# Altium PCB nrf24l01_cell(P40).PcbDoc (part 7 of 11)
Units mm, origin at the board's own origin, x right, y up, seen from the top; angles counter-clockwise.
Board outline 136.2 x 112.2 mm, 2 copper layers (TopLayer, BottomLayer); 520 components, 0 nets, 2804 pads, 1040 vias.
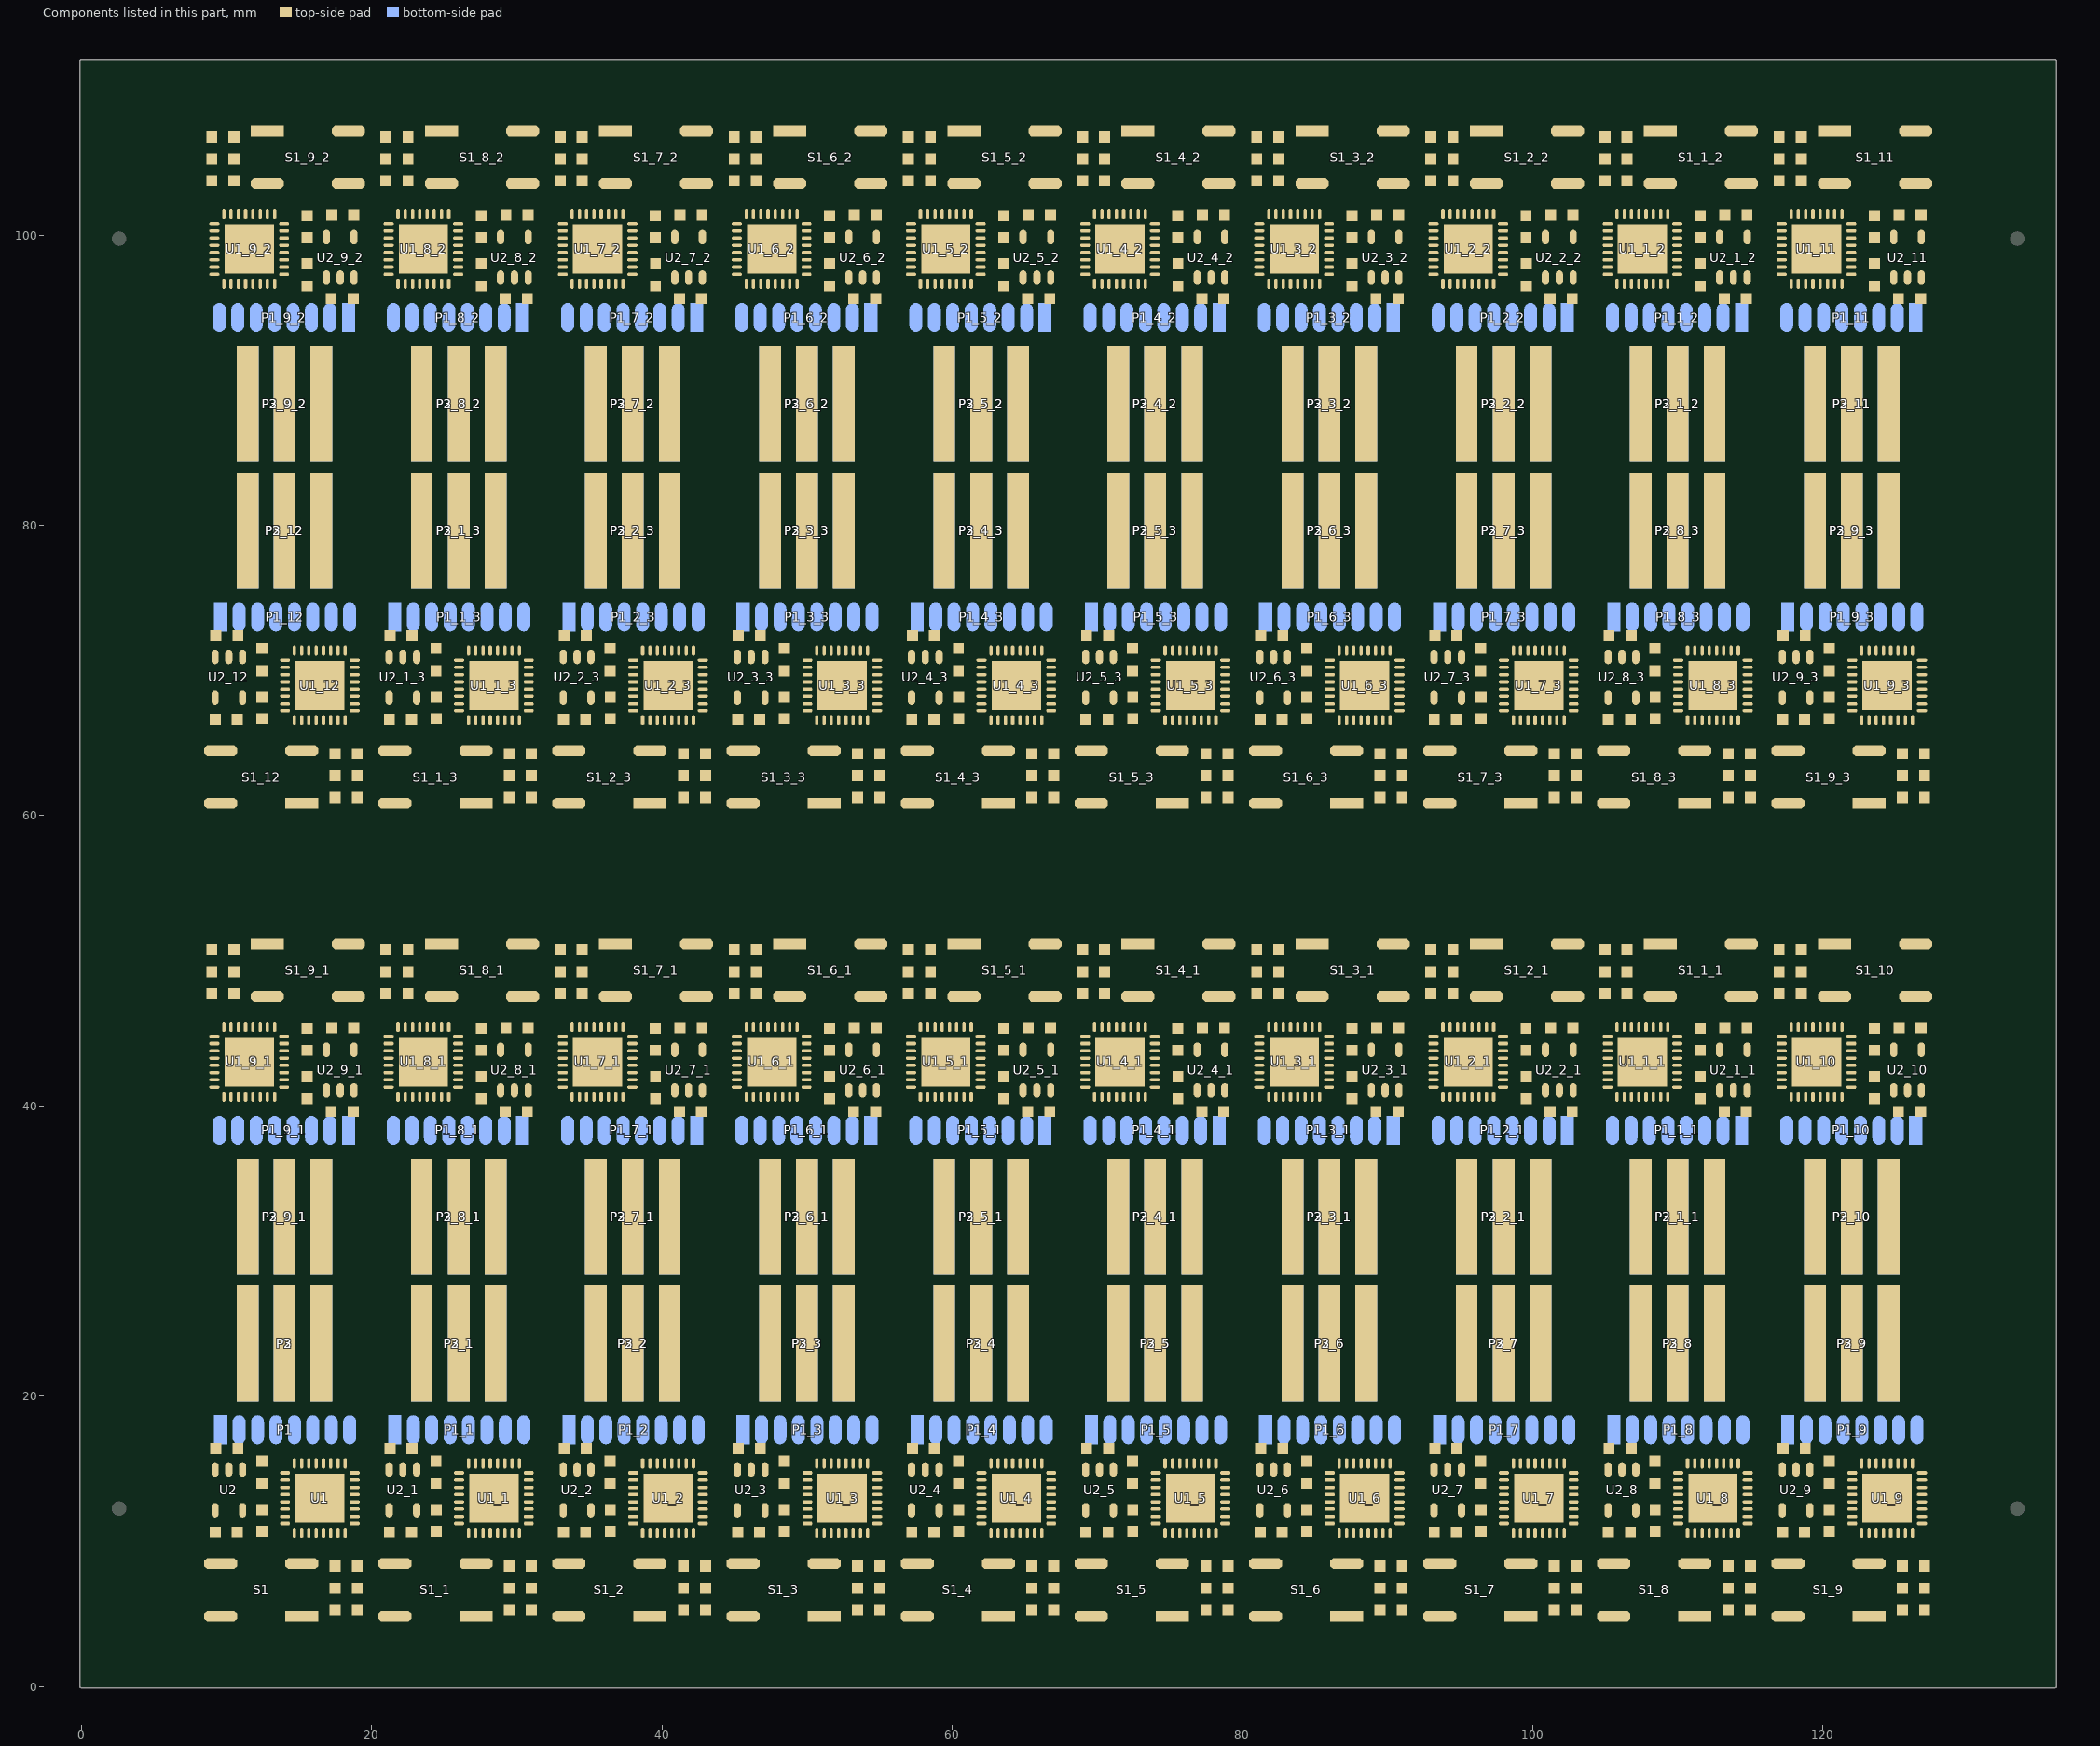
[diagram p7: the components of this part, seen from the top]

## Via types
v1: diameter 0.4, hole 0.2, TopLayer to BottomLayer, tented both sides, 1040 vias

## Nets (pads, with @x,y where several pads share a name; then routed paths per layer and width w, separated by ;. In a path a pad name is that pad's centre, name@x,y a point inside that pad or via, vN(x,y) a via of type N, cw(c..) or ccw(c..) an arc to the next point about the centre after c; other vN are vias at no path point) (continued)
copper on no net: (continued)
  TopLayer w0.254: 8.806,49.42 ccw(c8.373,49.853) 8.986,49.853 ccw(c9.599,49.853) 9.166,49.42 ; 8.806,50.58 cw(c8.373,50.147) 8.986,50.147 cw(c9.599,50.147) 9.166,50.58 ; 8.806,105.42 ccw(c8.373,105.853) 8.986,105.853 ccw(c9.599,105.853) 9.166,105.42 ; 8.806,106.58 cw(c8.373,106.147) 8.986,106.147 cw(c9.599,106.147) 9.166,106.58 ; 8.986,49.24 8.986,50.76 ; 8.986,105.24 8.986,106.76 ; 9.226,10.366 cw(c9.226,9.753) 9.66,10.186 cw(c10.093,10.62) 9.48,10.62 cw(c10.093,10.62) 9.66,11.054 cw(c9.226,11.487) 9.226,10.874 ; 9.226,66.366 cw(c9.226,65.753) 9.66,66.186 cw(c10.093,66.62) 9.48,66.62 cw(c10.093,66.62) 9.66,67.054 cw(c9.226,67.487) 9.226,66.874 ; 10.073,15.277 ccw(c9.863,15.487) 10.16,15.487 ccw(c10.457,15.487) 10.247,15.277 ; 10.073,71.277 ccw(c9.863,71.487) 10.16,71.487 ccw(c10.457,71.487) 10.247,71.277 ; 10.16,14.94 v1(10.16,15.75) 10.79,16.38 ; 10.16,70.94 v1(10.16,71.75) 10.79,72.38 ; 10.334,47.54 cw(c9.901,47.107) 10.514,47.107 cw(c11.127,47.107) 10.694,47.54 ; 10.334,103.54 cw(c9.901,103.107) 10.514,103.107 cw(c11.127,103.107) 10.694,103.54 ; 10.51,50.76 11.27,50.76 11.67,51.16 12.81,51.16 15.07,51.16 15.55,50.68 15.55,46.22 ; 10.51,106.76 11.27,106.76 11.67,107.16 12.81,107.16 15.07,107.16 15.55,106.68 15.55,102.22 ; 10.514,47.72 10.514,46.826 10.82,46.52 10.82,45.44 ; 10.514,103.72 10.514,102.826 10.82,102.52 10.82,101.44 ; 10.536,16.38 cw(c9.923,16.38) 10.356,15.946 cw(c10.79,15.513) 10.79,16.126 ; 10.536,72.38 cw(c9.923,72.38) 10.356,71.946 cw(c10.79,71.513) 10.79,72.126 ; 10.69,50.58 cw(c11.123,50.147) 11.123,50.76 cw(c11.123,51.373) 10.69,50.94 ; 10.69,106.58 cw(c11.123,106.147) 11.123,106.76 cw(c11.123,107.373) 10.69,106.94 ; 11.46,50.95 cw(c11.976,50.435) 12.048,51.16 ; 11.46,106.95 cw(c11.976,106.435) 12.048,107.16 ; 11.57,43.04 12.84,43.04 ; 11.57,99.04 12.84,99.04 ; 12.186,13.986 cw(c11.573,13.986) 12.006,13.552 cw(c12.44,13.119) 12.44,13.732 ; 12.186,69.986 cw(c11.573,69.986) 12.006,69.552 cw(c12.44,69.119) 12.44,69.732 ; 12.26,14.166 ccw(c11.827,14.599) 12.44,14.599 ccw(c13.053,14.599) 12.62,14.166 ; 12.26,70.166 ccw(c11.827,70.599) 12.44,70.599 ccw(c13.053,70.599) 12.62,70.166 ; 12.27,10.476 cw(c11.837,10.043) 12.45,10.043 cw(c13.063,10.043) 12.63,10.476 ; 12.27,66.476 cw(c11.837,66.043) 12.45,66.043 cw(c13.063,66.043) 12.63,66.476 ; v1(12.44,14.64) 12.44,13.986 11.914,13.46 10.48,13.46 10.02,13 10.02,11.414 9.226,10.62 v1(10.066,9.78) 12.45,9.78 ; v1(12.44,70.64) 12.44,69.986 11.914,69.46 10.48,69.46 10.02,69 10.02,67.414 9.226,66.62 v1(10.066,65.78) 12.45,65.78 ; 12.45,10.656 12.45,9.78 ; 12.45,66.656 12.45,65.78 ; 13.32,40.64 v1(13.95,40.64) ; 13.32,96.64 v1(13.95,96.64) ; 13.752,50.98 cw(c14.185,50.547) 14.185,51.16 cw(c14.185,51.773) 13.752,51.34 ; 13.752,106.98 cw(c14.185,106.547) 14.185,107.16 cw(c14.185,107.773) 13.752,107.34 ; v1(14.05,15.36) 14.68,15.36 ; v1(14.05,71.36) 14.68,71.36 ; 14.248,4.66 ccw(c13.815,4.227) 13.815,4.84 ccw(c13.815,5.453) 14.248,5.02 ; 14.248,60.66 ccw(c13.815,60.227) 13.815,60.84 ccw(c13.815,61.453) 14.248,61.02 ; 15.16,12.96 16.43,12.96 ; 15.16,68.96 16.43,68.96 ; 15.37,45.524 ccw(c14.937,45.957) 15.55,45.957 ccw(c16.163,45.957) 15.73,45.524 ; 15.37,101.524 ccw(c14.937,101.957) 15.55,101.957 ccw(c16.163,101.957) 15.73,101.524 ; 15.38,41.834 cw(c14.947,41.401) 15.56,41.401 cw(c16.173,41.401) 15.74,41.834 ; 15.38,97.834 cw(c14.947,97.401) 15.56,97.401 cw(c16.173,97.401) 15.74,97.834 ; 15.55,45.344 15.55,46.22 ; 15.55,101.344 15.55,102.22 ; v1(15.56,41.36) 15.56,42.014 16.086,42.54 17.52,42.54 17.98,43 17.98,44.586 18.774,45.38 v1(17.934,46.22) 15.55,46.22 ; 15.56,42.268 ccw(c15.56,42.881) 15.994,42.448 ccw(c16.427,42.014) 15.814,42.014 ; v1(15.56,97.36) 15.56,98.014 16.086,98.54 17.52,98.54 17.98,99 17.98,100.586 18.774,101.38 v1(17.934,102.22) 15.55,102.22 ; 15.56,98.268 ccw(c15.56,98.881) 15.994,98.448 ccw(c16.427,98.014) 15.814,98.014 ; 15.952,4.84 ccw(c16.024,5.565) 16.54,5.05 ; 15.952,60.84 ccw(c16.024,61.565) 16.54,61.05 ; 17.18,10.56 17.18,9.48 17.486,9.174 17.486,8.28 ; 17.18,66.56 17.18,65.48 17.486,65.174 17.486,64.28 ; 17.21,39.62 v1(17.84,40.25) 17.84,41.06 ; 17.21,39.874 ccw(c17.21,40.487) 17.644,40.054 ccw(c18.077,39.62) 17.464,39.62 ; 17.21,95.62 v1(17.84,96.25) 17.84,97.06 ; 17.21,95.874 ccw(c17.21,96.487) 17.644,96.054 ccw(c18.077,95.62) 17.464,95.62 ; 17.306,8.46 ccw(c16.873,8.893) 17.486,8.893 ccw(c18.099,8.893) 17.666,8.46 ; 17.306,64.46 ccw(c16.873,64.893) 17.486,64.893 ccw(c18.099,64.893) 17.666,64.46 ; 17.31,5.06 ccw(c16.877,4.627) 16.877,5.24 ccw(c16.877,5.853) 17.31,5.42 ; 17.31,61.06 ccw(c16.877,60.627) 16.877,61.24 ccw(c16.877,61.853) 17.31,61.42 ; 17.49,5.24 16.73,5.24 16.33,4.84 15.19,4.84 12.93,4.84 12.45,5.32 12.45,9.78 ; 17.49,61.24 16.73,61.24 16.33,60.84 15.19,60.84 12.93,60.84 12.45,61.32 12.45,65.78 ; 17.753,40.723 cw(c17.543,40.513) 17.84,40.513 cw(c18.137,40.513) 17.927,40.723 ; 17.753,96.723 cw(c17.543,96.513) 17.84,96.513 cw(c18.137,96.513) 17.927,96.723 ; 18.774,45.126 ccw(c18.774,44.513) 18.34,44.946 ccw(c17.907,45.38) 18.52,45.38 ccw(c17.907,45.38) 18.34,45.814 ccw(c18.774,46.247) 18.774,45.634 ; 18.774,101.126 ccw(c18.774,100.513) 18.34,100.946 ccw(c17.907,101.38) 18.52,101.38 ccw(c17.907,101.38) 18.34,101.814 ccw(c18.774,102.247) 18.774,101.634 ; 18.834,5.42 ccw(c18.401,5.853) 19.014,5.853 ccw(c19.627,5.853) 19.194,5.42 ; 18.834,6.58 cw(c18.401,6.147) 19.014,6.147 cw(c19.627,6.147) 19.194,6.58 ; 18.834,61.42 ccw(c18.401,61.853) 19.014,61.853 ccw(c19.627,61.853) 19.194,61.42 ; 18.834,62.58 cw(c18.401,62.147) 19.014,62.147 cw(c19.627,62.147) 19.194,62.58 ; 19.014,5.24 19.014,6.76 ; 19.014,61.24 19.014,62.76 ; 20.806,49.42 ccw(c20.373,49.853) 20.986,49.853 ccw(c21.599,49.853) 21.166,49.42 ; 20.806,50.58 cw(c20.373,50.147) 20.986,50.147 cw(c21.599,50.147) 21.166,50.58 ; 20.806,105.42 ccw(c20.373,105.853) 20.986,105.853 ccw(c21.599,105.853) 21.166,105.42 ; 20.806,106.58 cw(c20.373,106.147) 20.986,106.147 cw(c21.599,106.147) 21.166,106.58 ; 20.986,49.24 20.986,50.76 ; 20.986,105.24 20.986,106.76 ; 21.226,10.366 cw(c21.226,9.753) 21.66,10.186 cw(c22.093,10.62) 21.48,10.62 cw(c22.093,10.62) 21.66,11.054 cw(c21.226,11.487) 21.226,10.874 ; 21.226,66.366 cw(c21.226,65.753) 21.66,66.186 cw(c22.093,66.62) 21.48,66.62 cw(c22.093,66.62) 21.66,67.054 cw(c21.226,67.487) 21.226,66.874 ; 22.073,15.277 ccw(c21.863,15.487) 22.16,15.487 ccw(c22.457,15.487) 22.247,15.277 ; 22.073,71.277 ccw(c21.863,71.487) 22.16,71.487 ccw(c22.457,71.487) 22.247,71.277 ; 22.16,14.94 v1(22.16,15.75) 22.79,16.38 ; 22.16,70.94 v1(22.16,71.75) 22.79,72.38 ; 22.334,47.54 cw(c21.901,47.107) 22.514,47.107 cw(c23.127,47.107) 22.694,47.54 ; 22.334,103.54 cw(c21.901,103.107) 22.514,103.107 cw(c23.127,103.107) 22.694,103.54 ; 22.51,50.76 23.27,50.76 23.67,51.16 24.81,51.16 27.07,51.16 27.55,50.68 27.55,46.22 ; 22.51,106.76 23.27,106.76 23.67,107.16 24.81,107.16 27.07,107.16 27.55,106.68 27.55,102.22 ; 22.514,47.72 22.514,46.826 22.82,46.52 22.82,45.44 ; 22.514,103.72 22.514,102.826 22.82,102.52 22.82,101.44 ; 22.536,16.38 cw(c21.923,16.38) 22.356,15.946 cw(c22.79,15.513) 22.79,16.126 ; 22.536,72.38 cw(c21.923,72.38) 22.356,71.946 cw(c22.79,71.513) 22.79,72.126 ; 22.69,50.58 cw(c23.123,50.147) 23.123,50.76 cw(c23.123,51.373) 22.69,50.94 ; 22.69,106.58 cw(c23.123,106.147) 23.123,106.76 cw(c23.123,107.373) 22.69,106.94 ; 23.46,50.95 cw(c23.976,50.435) 24.048,51.16 ; 23.46,106.95 cw(c23.976,106.435) 24.048,107.16 ; 23.57,43.04 24.84,43.04 ; 23.57,99.04 24.84,99.04 ; 24.186,13.986 cw(c23.573,13.986) 24.006,13.552 cw(c24.44,13.119) 24.44,13.732 ; 24.186,69.986 cw(c23.573,69.986) 24.006,69.552 cw(c24.44,69.119) 24.44,69.732 ; 24.26,14.166 ccw(c23.827,14.599) 24.44,14.599 ccw(c25.053,14.599) 24.62,14.166 ; 24.26,70.166 ccw(c23.827,70.599) 24.44,70.599 ccw(c25.053,70.599) 24.62,70.166 ; 24.27,10.476 cw(c23.837,10.043) 24.45,10.043 cw(c25.063,10.043) 24.63,10.476 ; 24.27,66.476 cw(c23.837,66.043) 24.45,66.043 cw(c25.063,66.043) 24.63,66.476 ; v1(24.44,14.64) 24.44,13.986 23.914,13.46 22.48,13.46 22.02,13 22.02,11.414 21.226,10.62 v1(22.066,9.78) 24.45,9.78 ; v1(24.44,70.64) 24.44,69.986 23.914,69.46 22.48,69.46 22.02,69 22.02,67.414 21.226,66.62 v1(22.066,65.78) 24.45,65.78 ; 24.45,10.656 24.45,9.78 ; 24.45,66.656 24.45,65.78 ; 25.32,40.64 v1(25.95,40.64) ; 25.32,96.64 v1(25.95,96.64) ; 25.752,50.98 cw(c26.185,50.547) 26.185,51.16 cw(c26.185,51.773) 25.752,51.34 ; 25.752,106.98 cw(c26.185,106.547) 26.185,107.16 cw(c26.185,107.773) 25.752,107.34 ; v1(26.05,15.36) 26.68,15.36 ; v1(26.05,71.36) 26.68,71.36 ; 26.248,4.66 ccw(c25.815,4.227) 25.815,4.84 ccw(c25.815,5.453) 26.248,5.02 ; 26.248,60.66 ccw(c25.815,60.227) 25.815,60.84 ccw(c25.815,61.453) 26.248,61.02 ; 27.16,12.96 28.43,12.96 ; 27.16,68.96 28.43,68.96 ; 27.37,45.524 ccw(c26.937,45.957) 27.55,45.957 ccw(c28.163,45.957) 27.73,45.524 ; 27.37,101.524 ccw(c26.937,101.957) 27.55,101.957 ccw(c28.163,101.957) 27.73,101.524 ; 27.38,41.834 cw(c26.947,41.401) 27.56,41.401 cw(c28.173,41.401) 27.74,41.834 ; 27.38,97.834 cw(c26.947,97.401) 27.56,97.401 cw(c28.173,97.401) 27.74,97.834 ; 27.55,45.344 27.55,46.22 ; 27.55,101.344 27.55,102.22 ; v1(27.56,41.36) 27.56,42.014 28.086,42.54 29.52,42.54 29.98,43 29.98,44.586 30.774,45.38 v1(29.934,46.22) 27.55,46.22 ; 27.56,42.268 ccw(c27.56,42.881) 27.994,42.448 ccw(c28.427,42.014) 27.814,42.014 ; v1(27.56,97.36) 27.56,98.014 28.086,98.54 29.52,98.54 29.98,99 29.98,100.586 30.774,101.38 v1(29.934,102.22) 27.55,102.22 ; 27.56,98.268 ccw(c27.56,98.881) 27.994,98.448 ccw(c28.427,98.014) 27.814,98.014 ; 27.952,4.84 ccw(c28.024,5.565) 28.54,5.05 ; 27.952,60.84 ccw(c28.024,61.565) 28.54,61.05 ; 29.18,10.56 29.18,9.48 29.486,9.174 29.486,8.28 ; 29.18,66.56 29.18,65.48 29.486,65.174 29.486,64.28 ; 29.21,39.62 v1(29.84,40.25) 29.84,41.06 ; 29.21,39.874 ccw(c29.21,40.487) 29.644,40.054 ccw(c30.077,39.62) 29.464,39.62 ; 29.21,95.62 v1(29.84,96.25) 29.84,97.06 ; 29.21,95.874 ccw(c29.21,96.487) 29.644,96.054 ccw(c30.077,95.62) 29.464,95.62 ; 29.306,8.46 ccw(c28.873,8.893) 29.486,8.893 ccw(c30.099,8.893) 29.666,8.46 ; 29.306,64.46 ccw(c28.873,64.893) 29.486,64.893 ccw(c30.099,64.893) 29.666,64.46 ; 29.31,5.06 ccw(c28.877,4.627) 28.877,5.24 ccw(c28.877,5.853) 29.31,5.42 ; 29.31,61.06 ccw(c28.877,60.627) 28.877,61.24 ccw(c28.877,61.853) 29.31,61.42 ; 29.49,5.24 28.73,5.24 28.33,4.84 27.19,4.84 24.93,4.84 24.45,5.32 24.45,9.78 ; 29.49,61.24 28.73,61.24 28.33,60.84 27.19,60.84 24.93,60.84 24.45,61.32 24.45,65.78 ; 29.753,40.723 cw(c29.543,40.513) 29.84,40.513 cw(c30.137,40.513) 29.927,40.723 ; 29.753,96.723 cw(c29.543,96.513) 29.84,96.513 cw(c30.137,96.513) 29.927,96.723 ; 30.774,45.126 ccw(c30.774,44.513) 30.34,44.946 ccw(c29.907,45.38) 30.52,45.38 ccw(c29.907,45.38) 30.34,45.814 ccw(c30.774,46.247) 30.774,45.634 ; 30.774,101.126 ccw(c30.774,100.513) 30.34,100.946 ccw(c29.907,101.38) 30.52,101.38 ccw(c29.907,101.38) 30.34,101.814 ccw(c30.774,102.247) 30.774,101.634 ; 30.834,5.42 ccw(c30.401,5.853) 31.014,5.853 ccw(c31.627,5.853) 31.194,5.42 ; 30.834,6.58 cw(c30.401,6.147) 31.014,6.147 cw(c31.627,6.147) 31.194,6.58 ; 30.834,61.42 ccw(c30.401,61.853) 31.014,61.853 ccw(c31.627,61.853) 31.194,61.42 ; 30.834,62.58 cw(c30.401,62.147) 31.014,62.147 cw(c31.627,62.147) 31.194,62.58 ; 31.014,5.24 31.014,6.76 ; 31.014,61.24 31.014,62.76 ; 32.806,49.42 ccw(c32.373,49.853) 32.986,49.853 ccw(c33.599,49.853) 33.166,49.42 ; 32.806,50.58 cw(c32.373,50.147) 32.986,50.147 cw(c33.599,50.147) 33.166,50.58 ; 32.806,105.42 ccw(c32.373,105.853) 32.986,105.853 ccw(c33.599,105.853) 33.166,105.42 ; 32.806,106.58 cw(c32.373,106.147) 32.986,106.147 cw(c33.599,106.147) 33.166,106.58 ; 32.986,49.24 32.986,50.76 ; 32.986,105.24 32.986,106.76 ; 33.226,10.366 cw(c33.226,9.753) 33.66,10.186 cw(c34.093,10.62) 33.48,10.62 cw(c34.093,10.62) 33.66,11.054 cw(c33.226,11.487) 33.226,10.874 ; 33.226,66.366 cw(c33.226,65.753) 33.66,66.186 cw(c34.093,66.62) 33.48,66.62 cw(c34.093,66.62) 33.66,67.054 cw(c33.226,67.487) 33.226,66.874 ; 34.073,15.277 ccw(c33.863,15.487) 34.16,15.487 ccw(c34.457,15.487) 34.247,15.277 ; 34.073,71.277 ccw(c33.863,71.487) 34.16,71.487 ccw(c34.457,71.487) 34.247,71.277 ; 34.16,14.94 v1(34.16,15.75) 34.79,16.38 ; 34.16,70.94 v1(34.16,71.75) 34.79,72.38 ; 34.334,47.54 cw(c33.901,47.107) 34.514,47.107 cw(c35.127,47.107) 34.694,47.54 ; 34.334,103.54 cw(c33.901,103.107) 34.514,103.107 cw(c35.127,103.107) 34.694,103.54 ; 34.51,50.76 35.27,50.76 35.67,51.16 36.81,51.16 39.07,51.16 39.55,50.68 39.55,46.22 ; 34.51,106.76 35.27,106.76 35.67,107.16 36.81,107.16 39.07,107.16 39.55,106.68 39.55,102.22 ; 34.514,47.72 34.514,46.826 34.82,46.52 34.82,45.44 ; 34.514,103.72 34.514,102.826 34.82,102.52 34.82,101.44 ; 34.536,16.38 cw(c33.923,16.38) 34.356,15.946 cw(c34.79,15.513) 34.79,16.126 ; 34.536,72.38 cw(c33.923,72.38) 34.356,71.946 cw(c34.79,71.513) 34.79,72.126 ; 34.69,50.58 cw(c35.123,50.147) 35.123,50.76 cw(c35.123,51.373) 34.69,50.94 ; 34.69,106.58 cw(c35.123,106.147) 35.123,106.76 cw(c35.123,107.373) 34.69,106.94 ; 35.46,50.95 cw(c35.976,50.435) 36.048,51.16 ; 35.46,106.95 cw(c35.976,106.435) 36.048,107.16 ; 35.57,43.04 36.84,43.04 ; 35.57,99.04 36.84,99.04 ; 36.186,13.986 cw(c35.573,13.986) 36.006,13.552 cw(c36.44,13.119) 36.44,13.732 ; 36.186,69.986 cw(c35.573,69.986) 36.006,69.552 cw(c36.44,69.119) 36.44,69.732 ; 36.26,14.166 ccw(c35.827,14.599) 36.44,14.599 ccw(c37.053,14.599) 36.62,14.166 ; 36.26,70.166 ccw(c35.827,70.599) 36.44,70.599 ccw(c37.053,70.599) 36.62,70.166 ; 36.27,10.476 cw(c35.837,10.043) 36.45,10.043 cw(c37.063,10.043) 36.63,10.476 ; 36.27,66.476 cw(c35.837,66.043) 36.45,66.043 cw(c37.063,66.043) 36.63,66.476 ; v1(36.44,14.64) 36.44,13.986 35.914,13.46 34.48,13.46 34.02,13 34.02,11.414 33.226,10.62 v1(34.066,9.78) 36.45,9.78 ; v1(36.44,70.64) 36.44,69.986 35.914,69.46 34.48,69.46 34.02,69 34.02,67.414 33.226,66.62 v1(34.066,65.78) 36.45,65.78 ; 36.45,10.656 36.45,9.78 ; 36.45,66.656 36.45,65.78 ; 37.32,40.64 v1(37.95,40.64) ; 37.32,96.64 v1(37.95,96.64) ; 37.752,50.98 cw(c38.185,50.547) 38.185,51.16 cw(c38.185,51.773) 37.752,51.34 ; 37.752,106.98 cw(c38.185,106.547) 38.185,107.16 cw(c38.185,107.773) 37.752,107.34 ; v1(38.05,15.36) 38.68,15.36 ; v1(38.05,71.36) 38.68,71.36 ; 38.248,4.66 ccw(c37.815,4.227) 37.815,4.84 ccw(c37.815,5.453) 38.248,5.02 ; 38.248,60.66 ccw(c37.815,60.227) 37.815,60.84 ccw(c37.815,61.453) 38.248,61.02 ; 39.16,12.96 40.43,12.96 ; 39.16,68.96 40.43,68.96 ; 39.37,45.524 ccw(c38.937,45.957) 39.55,45.957 ccw(c40.163,45.957) 39.73,45.524 ; 39.37,101.524 ccw(c38.937,101.957) 39.55,101.957 ccw(c40.163,101.957) 39.73,101.524 ; 39.38,41.834 cw(c38.947,41.401) 39.56,41.401 cw(c40.173,41.401) 39.74,41.834 ; 39.38,97.834 cw(c38.947,97.401) 39.56,97.401 cw(c40.173,97.401) 39.74,97.834 ; 39.55,45.344 39.55,46.22 ; 39.55,101.344 39.55,102.22 ; v1(39.56,41.36) 39.56,42.014 40.086,42.54 41.52,42.54 41.98,43 41.98,44.586 42.774,45.38 v1(41.934,46.22) 39.55,46.22 ; 39.56,42.268 ccw(c39.56,42.881) 39.994,42.448 ccw(c40.427,42.014) 39.814,42.014 ; v1(39.56,97.36) 39.56,98.014 40.086,98.54 41.52,98.54 41.98,99 41.98,100.586 42.774,101.38 v1(41.934,102.22) 39.55,102.22 ; 39.56,98.268 ccw(c39.56,98.881) 39.994,98.448 ccw(c40.427,98.014) 39.814,98.014 ; 39.952,4.84 ccw(c40.024,5.565) 40.54,5.05 ; 39.952,60.84 ccw(c40.024,61.565) 40.54,61.05 ; 41.18,10.56 41.18,9.48 41.486,9.174 41.486,8.28 ; 41.18,66.56 41.18,65.48 41.486,65.174 41.486,64.28 ; 41.21,39.62 v1(41.84,40.25) 41.84,41.06 ; 41.21,39.874 ccw(c41.21,40.487) 41.644,40.054 ccw(c42.077,39.62) 41.464,39.62 ; 41.21,95.62 v1(41.84,96.25) 41.84,97.06 ; 41.21,95.874 ccw(c41.21,96.487) 41.644,96.054 ccw(c42.077,95.62) 41.464,95.62 ; 41.306,8.46 ccw(c40.873,8.893) 41.486,8.893 ccw(c42.099,8.893) 41.666,8.46 ; 41.306,64.46 ccw(c40.873,64.893) 41.486,64.893 ccw(c42.099,64.893) 41.666,64.46 ; 41.31,5.06 ccw(c40.877,4.627) 40.877,5.24 ccw(c40.877,5.853) 41.31,5.42 ; 41.31,61.06 ccw(c40.877,60.627) 40.877,61.24 ccw(c40.877,61.853) 41.31,61.42 ; 41.49,5.24 40.73,5.24 40.33,4.84 39.19,4.84 36.93,4.84 36.45,5.32 36.45,9.78 ; 41.49,61.24 40.73,61.24 40.33,60.84 39.19,60.84 36.93,60.84 36.45,61.32 36.45,65.78 ; 41.753,40.723 cw(c41.543,40.513) 41.84,40.513 cw(c42.137,40.513) 41.927,40.723 ; 41.753,96.723 cw(c41.543,96.513) 41.84,96.513 cw(c42.137,96.513) 41.927,96.723 ; 42.774,45.126 ccw(c42.774,44.513) 42.34,44.946 ccw(c41.907,45.38) 42.52,45.38 ccw(c41.907,45.38) 42.34,45.814 ccw(c42.774,46.247) 42.774,45.634 ; 42.774,101.126 ccw(c42.774,100.513) 42.34,100.946 ccw(c41.907,101.38) 42.52,101.38 ccw(c41.907,101.38) 42.34,101.814 ccw(c42.774,102.247) 42.774,101.634 ; 42.834,5.42 ccw(c42.401,5.853) 43.014,5.853 ccw(c43.627,5.853) 43.194,5.42 ; 42.834,6.58 cw(c42.401,6.147) 43.014,6.147 cw(c43.627,6.147) 43.194,6.58 ; 42.834,61.42 ccw(c42.401,61.853) 43.014,61.853 ccw(c43.627,61.853) 43.194,61.42 ; 42.834,62.58 cw(c42.401,62.147) 43.014,62.147 cw(c43.627,62.147) 43.194,62.58 ; 43.014,5.24 43.014,6.76 ; 43.014,61.24 43.014,62.76 ; 44.806,49.42 ccw(c44.373,49.853) 44.986,49.853 ccw(c45.599,49.853) 45.166,49.42 ; 44.806,50.58 cw(c44.373,50.147) 44.986,50.147 cw(c45.599,50.147) 45.166,50.58 ; 44.806,105.42 ccw(c44.373,105.853) 44.986,105.853 ccw(c45.599,105.853) 45.166,105.42 ; 44.806,106.58 cw(c44.373,106.147) 44.986,106.147 cw(c45.599,106.147) 45.166,106.58 ; 44.986,49.24 44.986,50.76 ; 44.986,105.24 44.986,106.76 ; 45.226,10.366 cw(c45.226,9.753) 45.66,10.186 cw(c46.093,10.62) 45.48,10.62 cw(c46.093,10.62) 45.66,11.054 cw(c45.226,11.487) 45.226,10.874 ; 45.226,66.366 cw(c45.226,65.753) 45.66,66.186 cw(c46.093,66.62) 45.48,66.62 cw(c46.093,66.62) 45.66,67.054 cw(c45.226,67.487) 45.226,66.874 ; 46.073,15.277 ccw(c45.863,15.487) 46.16,15.487 ccw(c46.457,15.487) 46.247,15.277 ; 46.073,71.277 ccw(c45.863,71.487) 46.16,71.487 ccw(c46.457,71.487) 46.247,71.277 ; 46.16,14.94 v1(46.16,15.75) 46.79,16.38 ; 46.16,70.94 v1(46.16,71.75) 46.79,72.38 ; 46.334,47.54 cw(c45.901,47.107) 46.514,47.107 cw(c47.127,47.107) 46.694,47.54 ; 46.334,103.54 cw(c45.901,103.107) 46.514,103.107 cw(c47.127,103.107) 46.694,103.54 ; 46.51,50.76 47.27,50.76 47.67,51.16 48.81,51.16 51.07,51.16 51.55,50.68 51.55,46.22 ; 46.51,106.76 47.27,106.76 47.67,107.16 48.81,107.16 51.07,107.16 51.55,106.68 51.55,102.22 ; 46.514,47.72 46.514,46.826 46.82,46.52 46.82,45.44 ; 46.514,103.72 46.514,102.826 46.82,102.52 46.82,101.44 ; 46.536,16.38 cw(c45.923,16.38) 46.356,15.946 cw(c46.79,15.513) 46.79,16.126 ; 46.536,72.38 cw(c45.923,72.38) 46.356,71.946 cw(c46.79,71.513) 46.79,72.126 ; 46.69,50.58 cw(c47.123,50.147) 47.123,50.76 cw(c47.123,51.373) 46.69,50.94 ; 46.69,106.58 cw(c47.123,106.147) 47.123,106.76 cw(c47.123,107.373) 46.69,106.94 ; 47.46,50.95 cw(c47.976,50.435) 48.048,51.16 ; 47.46,106.95 cw(c47.976,106.435) 48.048,107.16 ; 47.57,43.04 48.84,43.04 ; 47.57,99.04 48.84,99.04 ; 48.186,13.986 cw(c47.573,13.986) 48.006,13.552 cw(c48.44,13.119) 48.44,13.732 ; 48.186,69.986 cw(c47.573,69.986) 48.006,69.552 cw(c48.44,69.119) 48.44,69.732 ; 48.26,14.166 ccw(c47.827,14.599) 48.44,14.599 ccw(c49.053,14.599) 48.62,14.166 ; 48.26,70.166 ccw(c47.827,70.599) 48.44,70.599 ccw(c49.053,70.599) 48.62,70.166 ; 48.27,10.476 cw(c47.837,10.043) 48.45,10.043 cw(c49.063,10.043) 48.63,10.476 ; 48.27,66.476 cw(c47.837,66.043) 48.45,66.043 cw(c49.063,66.043) 48.63,66.476 ; v1(48.44,14.64) 48.44,13.986 47.914,13.46 46.48,13.46 46.02,13 46.02,11.414 45.226,10.62 v1(46.066,9.78) 48.45,9.78 ; v1(48.44,70.64) 48.44,69.986 47.914,69.46 46.48,69.46 46.02,69 46.02,67.414 45.226,66.62 v1(46.066,65.78) 48.45,65.78 ; 48.45,10.656 48.45,9.78 ; 48.45,66.656 48.45,65.78 ; 49.32,40.64 v1(49.95,40.64) ; 49.32,96.64 v1(49.95,96.64) ; 49.752,50.98 cw(c50.185,50.547) 50.185,51.16 cw(c50.185,51.773) 49.752,51.34 ; 49.752,106.98 cw(c50.185,106.547) 50.185,107.16 cw(c50.185,107.773) 49.752,107.34 ; v1(50.05,15.36) 50.68,15.36 ; v1(50.05,71.36) 50.68,71.36 ; 50.248,4.66 ccw(c49.815,4.227) 49.815,4.84 ccw(c49.815,5.453) 50.248,5.02 ; 50.248,60.66 ccw(c49.815,60.227) 49.815,60.84 ccw(c49.815,61.453) 50.248,61.02 ; 51.16,12.96 52.43,12.96 ; 51.16,68.96 52.43,68.96 ; 51.37,45.524 ccw(c50.937,45.957) 51.55,45.957 ccw(c52.163,45.957) 51.73,45.524 ; 51.37,101.524 ccw(c50.937,101.957) 51.55,101.957 ccw(c52.163,101.957) 51.73,101.524 ; 51.38,41.834 cw(c50.947,41.401) 51.56,41.401 cw(c52.173,41.401) 51.74,41.834 ; 51.38,97.834 cw(c50.947,97.401) 51.56,97.401 cw(c52.173,97.401) 51.74,97.834 ; 51.55,45.344 51.55,46.22 ; 51.55,101.344 51.55,102.22 ; v1(51.56,41.36) 51.56,42.014 52.086,42.54 53.52,42.54 53.98,43 53.98,44.586 54.774,45.38 v1(53.934,46.22) 51.55,46.22 ; 51.56,42.268 ccw(c51.56,42.881) 51.994,42.448 ccw(c52.427,42.014) 51.814,42.014 ; v1(51.56,97.36) 51.56,98.014 52.086,98.54 53.52,98.54 53.98,99 53.98,100.586 54.774,101.38 v1(53.934,102.22) 51.55,102.22 ; 51.56,98.268 ccw(c51.56,98.881) 51.994,98.448 ccw(c52.427,98.014) 51.814,98.014 ; 51.952,4.84 ccw(c52.024,5.565) 52.54,5.05 ; 51.952,60.84 ccw(c52.024,61.565) 52.54,61.05 ; 53.18,10.56 53.18,9.48 53.486,9.174 53.486,8.28 ; 53.18,66.56 53.18,65.48 53.486,65.174 53.486,64.28 ; 53.21,39.62 v1(53.84,40.25) 53.84,41.06 ; 53.21,39.874 ccw(c53.21,40.487) 53.644,40.054 ccw(c54.077,39.62) 53.464,39.62 ; 53.21,95.62 v1(53.84,96.25) 53.84,97.06 ; 53.21,95.874 ccw(c53.21,96.487) 53.644,96.054 ccw(c54.077,95.62) 53.464,95.62 ; 53.306,8.46 ccw(c52.873,8.893) 53.486,8.893 ccw(c54.099,8.893) 53.666,8.46 ; 53.306,64.46 ccw(c52.873,64.893) 53.486,64.893 ccw(c54.099,64.893) 53.666,64.46 ; 53.31,5.06 ccw(c52.877,4.627) 52.877,5.24 ccw(c52.877,5.853) 53.31,5.42 ; 53.31,61.06 ccw(c52.877,60.627) 52.877,61.24 ccw(c52.877,61.853) 53.31,61.42 ; 53.49,5.24 52.73,5.24 52.33,4.84 51.19,4.84 48.93,4.84 48.45,5.32 48.45,9.78 ; 53.49,61.24 52.73,61.24 52.33,60.84 51.19,60.84 48.93,60.84 48.45,61.32 48.45,65.78 ; 53.753,40.723 cw(c53.543,40.513) 53.84,40.513 cw(c54.137,40.513) 53.927,40.723 ; 53.753,96.723 cw(c53.543,96.513) 53.84,96.513 cw(c54.137,96.513) 53.927,96.723 ; 54.774,45.126 ccw(c54.774,44.513) 54.34,44.946 ccw(c53.907,45.38) 54.52,45.38 ccw(c53.907,45.38) 54.34,45.814 ccw(c54.774,46.247) 54.774,45.634 ; 54.774,101.126 ccw(c54.774,100.513) 54.34,100.946 ccw(c53.907,101.38) 54.52,101.38 ccw(c53.907,101.38) 54.34,101.814 ccw(c54.774,102.247) 54.774,101.634 ; 54.834,5.42 ccw(c54.401,5.853) 55.014,5.853 ccw(c55.627,5.853) 55.194,5.42 ; 54.834,6.58 cw(c54.401,6.147) 55.014,6.147 cw(c55.627,6.147) 55.194,6.58 ; 54.834,61.42 ccw(c54.401,61.853) 55.014,61.853 ccw(c55.627,61.853) 55.194,61.42 ; 54.834,62.58 cw(c54.401,62.147) 55.014,62.147 cw(c55.627,62.147) 55.194,62.58 ; 55.014,5.24 55.014,6.76 ; 55.014,61.24 55.014,62.76 ; 56.806,49.42 ccw(c56.373,49.853) 56.986,49.853 ccw(c57.599,49.853) 57.166,49.42 ; 56.806,50.58 cw(c56.373,50.147) 56.986,50.147 cw(c57.599,50.147) 57.166,50.58 ; 56.806,105.42 ccw(c56.373,105.853) 56.986,105.853 ccw(c57.599,105.853) 57.166,105.42 ; 56.806,106.58 cw(c56.373,106.147) 56.986,106.147 cw(c57.599,106.147) 57.166,106.58 ; 56.986,49.24 56.986,50.76 ; 56.986,105.24 56.986,106.76 ; 57.226,10.366 cw(c57.226,9.753) 57.66,10.186 cw(c58.093,10.62) 57.48,10.62 cw(c58.093,10.62) 57.66,11.054 cw(c57.226,11.487) 57.226,10.874 ; 57.226,66.366 cw(c57.226,65.753) 57.66,66.186 cw(c58.093,66.62) 57.48,66.62 cw(c58.093,66.62) 57.66,67.054 cw(c57.226,67.487) 57.226,66.874 ; 58.073,15.277 ccw(c57.863,15.487) 58.16,15.487 ccw(c58.457,15.487) 58.247,15.277 ; 58.073,71.277 ccw(c57.863,71.487) 58.16,71.487 ccw(c58.457,71.487) 58.247,71.277 ; 58.16,14.94 v1(58.16,15.75) 58.79,16.38 ; 58.16,70.94 v1(58.16,71.75) 58.79,72.38 ; 58.334,47.54 cw(c57.901,47.107) 58.514,47.107 cw(c59.127,47.107) 58.694,47.54 ; 58.334,103.54 cw(c57.901,103.107) 58.514,103.107 cw(c59.127,103.107) 58.694,103.54 ; 58.51,50.76 59.27,50.76 59.67,51.16 60.81,51.16 63.07,51.16 63.55,50.68 63.55,46.22 ; 58.51,106.76 59.27,106.76 59.67,107.16 60.81,107.16 63.07,107.16 63.55,106.68 63.55,102.22 ; 58.514,47.72 58.514,46.826 58.82,46.52 58.82,45.44 ; 58.514,103.72 58.514,102.826 58.82,102.52 58.82,101.44 ; 58.536,16.38 cw(c57.923,16.38) 58.356,15.946 cw(c58.79,15.513) 58.79,16.126 ; 58.536,72.38 cw(c57.923,72.38) 58.356,71.946 cw(c58.79,71.513) 58.79,72.126 ; 58.69,50.58 cw(c59.123,50.147) 59.123,50.76 cw(c59.123,51.373) 58.69,50.94 ; 58.69,106.58 cw(c59.123,106.147) 59.123,106.76 cw(c59.123,107.373) 58.69,106.94 ; 59.46,50.95 cw(c59.976,50.435) 60.048,51.16 ; 59.46,106.95 cw(c59.976,106.435) 60.048,107.16 ; 59.57,43.04 60.84,43.04 ; 59.57,99.04 60.84,99.04 ; 60.186,13.986 cw(c59.573,13.986) 60.006,13.552 cw(c60.44,13.119) 60.44,13.732 ; 60.186,69.986 cw(c59.573,69.986) 60.006,69.552 cw(c60.44,69.119) 60.44,69.732 ; 60.26,14.166 ccw(c59.827,14.599) 60.44,14.599 ccw(c61.053,14.599) 60.62,14.166 ; 60.26,70.166 ccw(c59.827,70.599) 60.44,70.599 ccw(c61.053,70.599) 60.62,70.166 ; 60.27,10.476 cw(c59.837,10.043) 60.45,10.043 cw(c61.063,10.043) 60.63,10.476 ; 60.27,66.476 cw(c59.837,66.043) 60.45,66.043 cw(c61.063,66.043) 60.63,66.476 ; v1(60.44,14.64) 60.44,13.986 59.914,13.46 58.48,13.46 58.02,13 58.02,11.414 57.226,10.62 v1(58.066,9.78) 60.45,9.78 ; v1(60.44,70.64) 60.44,69.986 59.914,69.46 58.48,69.46 58.02,69 58.02,67.414 57.226,66.62 v1(58.066,65.78) 60.45,65.78 ; 60.45,10.656 60.45,9.78 ; 60.45,66.656 60.45,65.78 ; 61.32,40.64 v1(61.95,40.64) ; 61.32,96.64 v1(61.95,96.64) ; 61.752,50.98 cw(c62.185,50.547) 62.185,51.16 cw(c62.185,51.773) 61.752,51.34 ; 61.752,106.98 cw(c62.185,106.547) 62.185,107.16 cw(c62.185,107.773) 61.752,107.34 ; v1(62.05,15.36) 62.68,15.36 ; v1(62.05,71.36) 62.68,71.36 ; 62.248,4.66 ccw(c61.815,4.227) 61.815,4.84 ccw(c61.815,5.453) 62.248,5.02 ; 62.248,60.66 ccw(c61.815,60.227) 61.815,60.84 ccw(c61.815,61.453) 62.248,61.02 ; 63.16,12.96 64.43,12.96 ; 63.16,68.96 64.43,68.96 ; 63.37,45.524 ccw(c62.937,45.957) 63.55,45.957 ccw(c64.163,45.957) 63.73,45.524 ; 63.37,101.524 ccw(c62.937,101.957) 63.55,101.957 ccw(c64.163,101.957) 63.73,101.524 ; 63.38,41.834 cw(c62.947,41.401) 63.56,41.401 cw(c64.173,41.401) 63.74,41.834 ; 63.38,97.834 cw(c62.947,97.401) 63.56,97.401 cw(c64.173,97.401) 63.74,97.834 ; 63.55,45.344 63.55,46.22 ; 63.55,101.344 63.55,102.22 ; v1(63.56,41.36) 63.56,42.014 64.086,42.54 65.52,42.54 65.98,43 65.98,44.586 66.774,45.38 v1(65.934,46.22) 63.55,46.22 ; 63.56,42.268 ccw(c63.56,42.881) 63.994,42.448 ccw(c64.427,42.014) 63.814,42.014 ; v1(63.56,97.36) 63.56,98.014 64.086,98.54 65.52,98.54 65.98,99 65.98,100.586 66.774,101.38 v1(65.934,102.22) 63.55,102.22 ; 63.56,98.268 ccw(c63.56,98.881) 63.994,98.448 ccw(c64.427,98.014) 63.814,98.014 ; 63.952,4.84 ccw(c64.024,5.565) 64.54,5.05 ; 63.952,60.84 ccw(c64.024,61.565) 64.54,61.05 ; 65.18,10.56 65.18,9.48 65.486,9.174 65.486,8.28 ; 65.18,66.56 65.18,65.48 65.486,65.174 65.486,64.28 ; 65.21,39.62 v1(65.84,40.25) 65.84,41.06 ; 65.21,39.874 ccw(c65.21,40.487) 65.644,40.054 ccw(c66.077,39.62) 65.464,39.62 ; 65.21,95.62 v1(65.84,96.25) 65.84,97.06 ; 65.21,95.874 ccw(c65.21,96.487) 65.644,96.054 ccw(c66.077,95.62) 65.464,95.62 ; 65.306,8.46 ccw(c64.873,8.893) 65.486,8.893 ccw(c66.099,8.893) 65.666,8.46 ; 65.306,64.46 ccw(c64.873,64.893) 65.486,64.893 ccw(c66.099,64.893) 65.666,64.46 ; 65.31,5.06 ccw(c64.877,4.627) 64.877,5.24 ccw(c64.877,5.853) 65.31,5.42 ; 65.31,61.06 ccw(c64.877,60.627) 64.877,61.24 ccw(c64.877,61.853) 65.31,61.42 ; 65.49,5.24 64.73,5.24 64.33,4.84 63.19,4.84 60.93,4.84 60.45,5.32 60.45,9.78 ; 65.49,61.24 64.73,61.24 64.33,60.84 63.19,60.84 60.93,60.84 60.45,61.32 60.45,65.78 ; 65.753,40.723 cw(c65.543,40.513) 65.84,40.513 cw(c66.137,40.513) 65.927,40.723 ; 65.753,96.723 cw(c65.543,96.513) 65.84,96.513 cw(c66.137,96.513) 65.927,96.723 ; 66.774,45.126 ccw(c66.774,44.513) 66.34,44.946 ccw(c65.907,45.38) 66.52,45.38 ccw(c65.907,45.38) 66.34,45.814 ccw(c66.774,46.247) 66.774,45.634 ; 66.774,101.126 ccw(c66.774,100.513) 66.34,100.946 ccw(c65.907,101.38) 66.52,101.38 ccw(c65.907,101.38) 66.34,101.814 ccw(c66.774,102.247) 66.774,101.634 ; 66.834,5.42 ccw(c66.401,5.853) 67.014,5.853 ccw(c67.627,5.853) 67.194,5.42 ; 66.834,6.58 cw(c66.401,6.147) 67.014,6.147 cw(c67.627,6.147) 67.194,6.58 ; 66.834,61.42 ccw(c66.401,61.853) 67.014,61.853 ccw(c67.627,61.853) 67.194,61.42 ; 66.834,62.58 cw(c66.401,62.147) 67.014,62.147 cw(c67.627,62.147) 67.194,62.58 ; 67.014,5.24 67.014,6.76 ; 67.014,61.24 67.014,62.76 ; 68.806,49.42 ccw(c68.373,49.853) 68.986,49.853 ccw(c69.599,49.853) 69.166,49.42 ; 68.806,50.58 cw(c68.373,50.147) 68.986,50.147 cw(c69.599,50.147) 69.166,50.58 ; 68.806,105.42 ccw(c68.373,105.853) 68.986,105.853 ccw(c69.599,105.853) 69.166,105.42 ; 68.806,106.58 cw(c68.373,106.147) 68.986,106.147 cw(c69.599,106.147) 69.166,106.58 ; 68.986,49.24 68.986,50.76 ; 68.986,105.24 68.986,106.76 ; 69.226,10.366 cw(c69.226,9.753) 69.66,10.186 cw(c70.093,10.62) 69.48,10.62 cw(c70.093,10.62) 69.66,11.054 cw(c69.226,11.487) 69.226,10.874 ; 69.226,66.366 cw(c69.226,65.753) 69.66,66.186 cw(c70.093,66.62) 69.48,66.62 cw(c70.093,66.62) 69.66,67.054 cw(c69.226,67.487) 69.226,66.874 ; 70.073,15.277 ccw(c69.863,15.487) 70.16,15.487 ccw(c70.457,15.487) 70.247,15.277 ; 70.073,71.277 ccw(c69.863,71.487) 70.16,71.487 ccw(c70.457,71.487) 70.247,71.277 ; 70.16,14.94 v1(70.16,15.75) 70.79,16.38 ; 70.16,70.94 v1(70.16,71.75) 70.79,72.38 ; 70.334,47.54 cw(c69.901,47.107) 70.514,47.107 cw(c71.127,47.107) 70.694,47.54 ; 70.334,103.54 cw(c69.901,103.107) 70.514,103.107 cw(c71.127,103.107) 70.694,103.54 ; 70.51,50.76 71.27,50.76 71.67,51.16 72.81,51.16 75.07,51.16 75.55,50.68 75.55,46.22 ; 70.51,106.76 71.27,106.76 71.67,107.16 72.81,107.16 75.07,107.16 75.55,106.68 75.55,102.22 ; 70.514,47.72 70.514,46.826 70.82,46.52 70.82,45.44 ; 70.514,103.72 70.514,102.826 70.82,102.52 70.82,101.44 ; 70.536,16.38 cw(c69.923,16.38) 70.356,15.946 cw(c70.79,15.513) 70.79,16.126 ; 70.536,72.38 cw(c69.923,72.38) 70.356,71.946 cw(c70.79,71.513) 70.79,72.126 ; 70.69,50.58 cw(c71.123,50.147) 71.123,50.76 cw(c71.123,51.373) 70.69,50.94 ; 70.69,106.58 cw(c71.123,106.147) 71.123,106.76 cw(c71.123,107.373) 70.69,106.94 ; 71.46,50.95 cw(c71.976,50.435) 72.048,51.16 ; 71.46,106.95 cw(c71.976,106.435) 72.048,107.16 ; 71.57,43.04 72.84,43.04 ; 71.57,99.04 72.84,99.04 ; 72.186,13.986 cw(c71.573,13.986) 72.006,13.552 cw(c72.44,13.119) 72.44,13.732 ; 72.186,69.986 cw(c71.573,69.986) 72.006,69.552 cw(c72.44,69.119) 72.44,69.732 ; 72.26,14.166 ccw(c71.827,14.599) 72.44,14.599 ccw(c73.053,14.599) 72.62,14.166 ; 72.26,70.166 ccw(c71.827,70.599) 72.44,70.599 ccw(c73.053,70.599) 72.62,70.166 ; 72.27,10.476 cw(c71.837,10.043) 72.45,10.043 cw(c73.063,10.043) 72.63,10.476 ; 72.27,66.476 cw(c71.837,66.043) 72.45,66.043 cw(c73.063,66.043) 72.63,66.476 ; v1(72.44,14.64) 72.44,13.986 71.914,13.46 70.48,13.46 70.02,13 70.02,11.414 69.226,10.62 v1(70.066,9.78) 72.45,9.78 ; v1(72.44,70.64) 72.44,69.986 71.914,69.46 70.48,69.46 70.02,69 70.02,67.414 69.226,66.62 v1(70.066,65.78) 72.45,65.78 ; 72.45,10.656 72.45,9.78 ; 72.45,66.656 72.45,65.78 ; 73.32,40.64 v1(73.95,40.64) ; 73.32,96.64 v1(73.95,96.64) ; 73.752,50.98 cw(c74.185,50.547) 74.185,51.16 cw(c74.185,51.773) 73.752,51.34 ; 73.752,106.98 cw(c74.185,106.547) 74.185,107.16 cw(c74.185,107.773) 73.752,107.34 ; v1(74.05,15.36) 74.68,15.36 ; v1(74.05,71.36) 74.68,71.36 ; 74.248,4.66 ccw(c73.815,4.227) 73.815,4.84 ccw(c73.815,5.453) 74.248,5.02 ; 74.248,60.66 ccw(c73.815,60.227) 73.815,60.84 ccw(c73.815,61.453) 74.248,61.02 ; 75.16,12.96 76.43,12.96 ; 75.16,68.96 76.43,68.96 ; 75.37,45.524 ccw(c74.937,45.957) 75.55,45.957 ccw(c76.163,45.957) 75.73,45.524 ; 75.37,101.524 ccw(c74.937,101.957) 75.55,101.957 ccw(c76.163,101.957) 75.73,101.524 ; 75.38,41.834 cw(c74.947,41.401) 75.56,41.401 cw(c76.173,41.401) 75.74,41.834 ; 75.38,97.834 cw(c74.947,97.401) 75.56,97.401 cw(c76.173,97.401) 75.74,97.834 ; 75.55,45.344 75.55,46.22 ; 75.55,101.344 75.55,102.22 ; v1(75.56,41.36) 75.56,42.014 76.086,42.54 77.52,42.54 77.98,43 77.98,44.586 78.774,45.38 v1(77.934,46.22) 75.55,46.22 ; 75.56,42.268 ccw(c75.56,42.881) 75.994,42.448 ccw(c76.427,42.014) 75.814,42.014 ; v1(75.56,97.36) 75.56,98.014 76.086,98.54 77.52,98.54 77.98,99 77.98,100.586 78.774,101.38 v1(77.934,102.22) 75.55,102.22 ; 75.56,98.268 ccw(c75.56,98.881) 75.994,98.448 ccw(c76.427,98.014) 75.814,98.014 ; 75.952,4.84 ccw(c76.024,5.565) 76.54,5.05 ; 75.952,60.84 ccw(c76.024,61.565) 76.54,61.05 ; 77.18,10.56 77.18,9.48 77.486,9.174 77.486,8.28 ; 77.18,66.56 77.18,65.48 77.486,65.174 77.486,64.28 ; 77.21,39.62 v1(77.84,40.25) 77.84,41.06 ; 77.21,39.874 ccw(c77.21,40.487) 77.644,40.054 ccw(c78.077,39.62) 77.464,39.62 ; 77.21,95.62 v1(77.84,96.25) 77.84,97.06 ; 77.21,95.874 ccw(c77.21,96.487) 77.644,96.054 ccw(c78.077,95.62) 77.464,95.62 ; 77.306,8.46 ccw(c76.873,8.893) 77.486,8.893 ccw(c78.099,8.893) 77.666,8.46 ; 77.306,64.46 ccw(c76.873,64.893) 77.486,64.893 ccw(c78.099,64.893) 77.666,64.46 ; 77.31,5.06 ccw(c76.877,4.627) 76.877,5.24 ccw(c76.877,5.853) 77.31,5.42 ; 77.31,61.06 ccw(c76.877,60.627) 76.877,61.24 ccw(c76.877,61.853) 77.31,61.42 ; 77.49,5.24 76.73,5.24 76.33,4.84 75.19,4.84 72.93,4.84 72.45,5.32 72.45,9.78 ; 77.49,61.24 76.73,61.24 76.33,60.84 75.19,60.84 72.93,60.84 72.45,61.32 72.45,65.78 ; 77.753,40.723 cw(c77.543,40.513) 77.84,40.513 cw(c78.137,40.513) 77.927,40.723 ; 77.753,96.723 cw(c77.543,96.513) 77.84,96.513 cw(c78.137,96.513) 77.927,96.723 ; 78.774,45.126 ccw(c78.774,44.513) 78.34,44.946 ccw(c77.907,45.38) 78.52,45.38 ccw(c77.907,45.38) 78.34,45.814 ccw(c78.774,46.247) 78.774,45.634 ; 78.774,101.126 ccw(c78.774,100.513) 78.34,100.946 ccw(c77.907,101.38) 78.52,101.38 ccw(c77.907,101.38) 78.34,101.814 ccw(c78.774,102.247) 78.774,101.634 ; 78.834,5.42 ccw(c78.401,5.853) 79.014,5.853 ccw(c79.627,5.853) 79.194,5.42 ; 78.834,6.58 cw(c78.401,6.147) 79.014,6.147 cw(c79.627,6.147) 79.194,6.58 ; 78.834,61.42 ccw(c78.401,61.853) 79.014,61.853 ccw(c79.627,61.853) 79.194,61.42 ; 78.834,62.58 cw(c78.401,62.147) 79.014,62.147 cw(c79.627,62.147) 79.194,62.58 ; 79.014,5.24 79.014,6.76 ; 79.014,61.24 79.014,62.76 ; 80.806,49.42 ccw(c80.373,49.853) 80.986,49.853 ccw(c81.599,49.853) 81.166,49.42 ; 80.806,50.58 cw(c80.373,50.147) 80.986,50.147 cw(c81.599,50.147) 81.166,50.58 ; 80.806,105.42 ccw(c80.373,105.853) 80.986,105.853 ccw(c81.599,105.853) 81.166,105.42 ; 80.806,106.58 cw(c80.373,106.147) 80.986,106.147 cw(c81.599,106.147) 81.166,106.58 ; 80.986,49.24 80.986,50.76 ; 80.986,105.24 80.986,106.76 ; 81.226,10.366 cw(c81.226,9.753) 81.66,10.186 cw(c82.093,10.62) 81.48,10.62 cw(c82.093,10.62) 81.66,11.054 cw(c81.226,11.487) 81.226,10.874 ; 81.226,66.366 cw(c81.226,65.753) 81.66,66.186 cw(c82.093,66.62) 81.48,66.62 cw(c82.093,66.62) 81.66,67.054 cw(c81.226,67.487) 81.226,66.874 ; 82.073,15.277 ccw(c81.863,15.487) 82.16,15.487 ccw(c82.457,15.487) 82.247,15.277 ; 82.073,71.277 ccw(c81.863,71.487) 82.16,71.487 ccw(c82.457,71.487) 82.247,71.277 ; 82.16,14.94 v1(82.16,15.75) 82.79,16.38 ; 82.16,70.94 v1(82.16,71.75) 82.79,72.38 ; 82.334,47.54 cw(c81.901,47.107) 82.514,47.107 cw(c83.127,47.107) 82.694,47.54 ; 82.334,103.54 cw(c81.901,103.107) 82.514,103.107 cw(c83.127,103.107) 82.694,103.54 ; 82.51,50.76 83.27,50.76 83.67,51.16 84.81,51.16 87.07,51.16 87.55,50.68 87.55,46.22 ; 82.51,106.76 83.27,106.76 83.67,107.16 84.81,107.16 87.07,107.16 87.55,106.68 87.55,102.22 ; 82.514,47.72 82.514,46.826 82.82,46.52 82.82,45.44 ; 82.514,103.72 82.514,102.826 82.82,102.52 82.82,101.44 ; 82.536,16.38 cw(c81.923,16.38) 82.356,15.946 cw(c82.79,15.513) 82.79,16.126 ; 82.536,72.38 cw(c81.923,72.38) 82.356,71.946 cw(c82.79,71.513) 82.79,72.126 ; 82.69,50.58 cw(c83.123,50.147) 83.123,50.76 cw(c83.123,51.373) 82.69,50.94 ; 82.69,106.58 cw(c83.123,106.147) 83.123,106.76 cw(c83.123,107.373) 82.69,106.94 ; 83.46,50.95 cw(c83.976,50.435) 84.048,51.16 ; 83.46,106.95 cw(c83.976,106.435) 84.048,107.16 ; 83.57,43.04 84.84,43.04 ; 83.57,99.04 84.84,99.04 ; 84.186,13.986 cw(c83.573,13.986) 84.006,13.552 cw(c84.44,13.119) 84.44,13.732 ; 84.186,69.986 cw(c83.573,69.986) 84.006,69.552 cw(c84.44,69.119) 84.44,69.732 ; 84.26,14.166 ccw(c83.827,14.599) 84.44,14.599 ccw(c85.053,14.599) 84.62,14.166 ; 84.26,70.166 ccw(c83.827,70.599) 84.44,70.599 ccw(c85.053,70.599) 84.62,70.166 ; 84.27,10.476 cw(c83.837,10.043) 84.45,10.043 cw(c85.063,10.043) 84.63,10.476 ; 84.27,66.476 cw(c83.837,66.043) 84.45,66.043 cw(c85.063,66.043) 84.63,66.476 ; v1(84.44,14.64) 84.44,13.986 83.914,13.46 82.48,13.46 82.02,13 82.02,11.414 81.226,10.62 v1(82.066,9.78) 84.45,9.78 ; v1(84.44,70.64) 84.44,69.986 83.914,69.46 82.48,69.46 82.02,69 82.02,67.414 81.226,66.62 v1(82.066,65.78) 84.45,65.78 ; 84.45,10.656 84.45,9.78 ; 84.45,66.656 84.45,65.78 ; 85.32,40.64 v1(85.95,40.64) ; 85.32,96.64 v1(85.95,96.64) ; 85.752,50.98 cw(c86.185,50.547) 86.185,51.16 cw(c86.185,51.773) 85.752,51.34 ; 85.752,106.98 cw(c86.185,106.547) 86.185,107.16 cw(c86.185,107.773) 85.752,107.34 ; v1(86.05,15.36) 86.68,15.36 ; v1(86.05,71.36) 86.68,71.36 ; 86.248,4.66 ccw(c85.815,4.227) 85.815,4.84 ccw(c85.815,5.453) 86.248,5.02 ; 86.248,60.66 ccw(c85.815,60.227) 85.815,60.84 ccw(c85.815,61.453) 86.248,61.02 ; 87.16,12.96 88.43,12.96 ; 87.16,68.96 88.43,68.96 ; 87.37,45.524 ccw(c86.937,45.957) 87.55,45.957 ccw(c88.163,45.957) 87.73,45.524 ; 87.37,101.524 ccw(c86.937,101.957) 87.55,101.957 ccw(c88.163,101.957) 87.73,101.524 ; 87.38,41.834 cw(c86.947,41.401) 87.56,41.401 cw(c88.173,41.401) 87.74,41.834 ; 87.38,97.834 cw(c86.947,97.401) 87.56,97.401 cw(c88.173,97.401) 87.74,97.834 ; 87.55,45.344 87.55,46.22 ; 87.55,101.344 87.55,102.22 ; v1(87.56,41.36) 87.56,42.014 88.086,42.54 89.52,42.54 89.98,43 89.98,44.586 90.774,45.38 v1(89.934,46.22) 87.55,46.22 ; 87.56,42.268 ccw(c87.56,42.881) 87.994,42.448 ccw(c88.427,42.014) 87.814,42.014 ; v1(87.56,97.36) 87.56,98.014 88.086,98.54 89.52,98.54 89.98,99 89.98,100.586 90.774,101.38 v1(89.934,102.22) 87.55,102.22 ; 87.56,98.268 ccw(c87.56,98.881) 87.994,98.448 ccw(c88.427,98.014) 87.814,98.014 ; 87.952,4.84 ccw(c88.024,5.565) 88.54,5.05 ; 87.952,60.84 ccw(c88.024,61.565) 88.54,61.05 ; 89.18,10.56 89.18,9.48 89.486,9.174 89.486,8.28 ; 89.18,66.56 89.18,65.48 89.486,65.174 89.486,64.28 ; 89.21,39.62 v1(89.84,40.25) 89.84,41.06 ; 89.21,39.874 ccw(c89.21,40.487) 89.644,40.054 ccw(c90.077,39.62) 89.464,39.62 ; 89.21,95.62 v1(89.84,96.25) 89.84,97.06 ; 89.21,95.874 ccw(c89.21,96.487) 89.644,96.054 ccw(c90.077,95.62) 89.464,95.62 ; 89.306,8.46 ccw(c88.873,8.893) 89.486,8.893 ccw(c90.099,8.893) 89.666,8.46 ; 89.306,64.46 ccw(c88.873,64.893) 89.486,64.893 ccw(c90.099,64.893) 89.666,64.46 ; 89.31,5.06 ccw(c88.877,4.627) 88.877,5.24 ccw(c88.877,5.853) 89.31,5.42 ; 89.31,61.06 ccw(c88.877,60.627) 88.877,61.24 ccw(c88.877,61.853) 89.31,61.42 ; 89.49,5.24 88.73,5.24 88.33,4.84 87.19,4.84 84.93,4.84 84.45,5.32 84.45,9.78 ; 89.49,61.24 88.73,61.24 88.33,60.84 87.19,60.84 84.93,60.84 84.45,61.32 84.45,65.78 ; 89.753,40.723 cw(c89.543,40.513) 89.84,40.513 cw(c90.137,40.513) 89.927,40.723 ; 89.753,96.723 cw(c89.543,96.513) 89.84,96.513 cw(c90.137,96.513) 89.927,96.723 ; 90.774,45.126 ccw(c90.774,44.513) 90.34,44.946 ccw(c89.907,45.38) 90.52,45.38 ccw(c89.907,45.38) 90.34,45.814 ccw(c90.774,46.247) 90.774,45.634 ; 90.774,101.126 ccw(c90.774,100.513) 90.34,100.946 ccw(c89.907,101.38) 90.52,101.38 ccw(c89.907,101.38) 90.34,101.814 ccw(c90.774,102.247) 90.774,101.634 ; 90.834,5.42 ccw(c90.401,5.853) 91.014,5.853 ccw(c91.627,5.853) 91.194,5.42 ; 90.834,6.58 cw(c90.401,6.147) 91.014,6.147 cw(c91.627,6.147) 91.194,6.58 ; 90.834,61.42 ccw(c90.401,61.853) 91.014,61.853 ccw(c91.627,61.853) 91.194,61.42 ; 90.834,62.58 cw(c90.401,62.147) 91.014,62.147 cw(c91.627,62.147) 91.194,62.58 ; 91.014,5.24 91.014,6.76 ; 91.014,61.24 91.014,62.76 ; 92.806,49.42 ccw(c92.373,49.853) 92.986,49.853 ccw(c93.599,49.853) 93.166,49.42 ; 92.806,50.58 cw(c92.373,50.147) 92.986,50.147 cw(c93.599,50.147) 93.166,50.58 ; 92.806,105.42 ccw(c92.373,105.853) 92.986,105.853 ccw(c93.599,105.853) 93.166,105.42 ; 92.806,106.58 cw(c92.373,106.147) 92.986,106.147 cw(c93.599,106.147) 93.166,106.58 ; 92.986,49.24 92.986,50.76 ; 92.986,105.24 92.986,106.76 ; 93.226,10.366 cw(c93.226,9.753) 93.66,10.186 cw(c94.093,10.62) 93.48,10.62 cw(c94.093,10.62) 93.66,11.054 cw(c93.226,11.487) 93.226,10.874 ; 93.226,66.366 cw(c93.226,65.753) 93.66,66.186 cw(c94.093,66.62) 93.48,66.62 cw(c94.093,66.62) 93.66,67.054 cw(c93.226,67.487) 93.226,66.874 ; 94.073,15.277 ccw(c93.863,15.487) 94.16,15.487 ccw(c94.457,15.487) 94.247,15.277 ; 94.073,71.277 ccw(c93.863,71.487) 94.16,71.487 ccw(c94.457,71.487) 94.247,71.277 ; 94.16,14.94 v1(94.16,15.75) 94.79,16.38 ; 94.16,70.94 v1(94.16,71.75) 94.79,72.38 ; 94.334,47.54 cw(c93.901,47.107) 94.514,47.107 cw(c95.127,47.107) 94.694,47.54 ; 94.334,103.54 cw(c93.901,103.107) 94.514,103.107 cw(c95.127,103.107) 94.694,103.54 ; 94.51,50.76 95.27,50.76 95.67,51.16 96.81,51.16 99.07,51.16 99.55,50.68 99.55,46.22 ; 94.51,106.76 95.27,106.76 95.67,107.16 96.81,107.16 99.07,107.16 99.55,106.68 99.55,102.22 ; 94.514,47.72 94.514,46.826 94.82,46.52 94.82,45.44 ; 94.514,103.72 94.514,102.826 94.82,102.52 94.82,101.44 ; 94.536,16.38 cw(c93.923,16.38) 94.356,15.946 cw(c94.79,15.513) 94.79,16.126 ; 94.536,72.38 cw(c93.923,72.38) 94.356,71.946 cw(c94.79,71.513) 94.79,72.126 ; 94.69,50.58 cw(c95.123,50.147) 95.123,50.76 cw(c95.123,51.373) 94.69,50.94 ; 94.69,106.58 cw(c95.123,106.147) 95.123,106.76 cw(c95.123,107.373) 94.69,106.94 ; 95.46,50.95 cw(c95.976,50.435) 96.048,51.16 ; 95.46,106.95 cw(c95.976,106.435) 96.048,107.16 ; 95.57,43.04 96.84,43.04 ; 95.57,99.04 96.84,99.04 ; 96.186,13.986 cw(c95.573,13.986) 96.006,13.552 cw(c96.44,13.119) 96.44,13.732 ; 96.186,69.986 cw(c95.573,69.986) 96.006,69.552 cw(c96.44,69.119) 96.44,69.732 ; 96.26,14.166 ccw(c95.827,14.599) 96.44,14.599 ccw(c97.053,14.599) 96.62,14.166 ; 96.26,70.166 ccw(c95.827,70.599) 96.44,70.599 ccw(c97.053,70.599) 96.62,70.166 ; 96.27,10.476 cw(c95.837,10.043) 96.45,10.043 cw(c97.063,10.043) 96.63,10.476 ; 96.27,66.476 cw(c95.837,66.043) 96.45,66.043 cw(c97.063,66.043) 96.63,66.476 ; v1(96.44,14.64) 96.44,13.986 95.914,13.46 94.48,13.46 94.02,13 94.02,11.414 93.226,10.62 v1(94.066,9.78) 96.45,9.78 ; v1(96.44,70.64) 96.44,69.986 95.914,69.46 94.48,69.46 94.02,69 94.02,67.414 93.226,66.62 v1(94.066,65.78) 96.45,65.78 ; 96.45,10.656 96.45,9.78 ; 96.45,66.656 96.45,65.78 ; 97.32,40.64 v1(97.95,40.64) ; 97.32,96.64 v1(97.95,96.64) ; 97.752,50.98 cw(c98.185,50.547) 98.185,51.16 cw(c98.185,51.773) 97.752,51.34 ; 97.752,106.98 cw(c98.185,106.547) 98.185,107.16 cw(c98.185,107.773) 97.752,107.34 ; v1(98.05,15.36) 98.68,15.36 ; v1(98.05,71.36) 98.68,71.36 ; 98.248,4.66 ccw(c97.815,4.227) 97.815,4.84 ccw(c97.815,5.453) 98.248,5.02 ; 98.248,60.66 ccw(c97.815,60.227) 97.815,60.84 ccw(c97.815,61.453) 98.248,61.02 ; 99.16,12.96 100.43,12.96 ; 99.16,68.96 100.43,68.96 ; 99.37,45.524 ccw(c98.937,45.957) 99.55,45.957 ccw(c100.163,45.957) 99.73,45.524 ; 99.37,101.524 ccw(c98.937,101.957) 99.55,101.957 ccw(c100.163,101.957) 99.73,101.524 ; 99.38,41.834 cw(c98.947,41.401) 99.56,41.401 cw(c100.173,41.401) 99.74,41.834 ; 99.38,97.834 cw(c98.947,97.401) 99.56,97.401 cw(c100.173,97.401) 99.74,97.834 ; 99.55,45.344 99.55,46.22 ; 99.55,101.344 99.55,102.22 ; v1(99.56,41.36) 99.56,42.014 100.086,42.54 101.52,42.54 101.98,43 101.98,44.586 102.774,45.38 v1(101.934,46.22) 99.55,46.22 ; 99.56,42.268 ccw(c99.56,42.881) 99.994,42.448 ccw(c100.427,42.014) 99.814,42.014 ; v1(99.56,97.36) 99.56,98.014 100.086,98.54 101.52,98.54 101.98,99 101.98,100.586 102.774,101.38 v1(101.934,102.22) 99.55,102.22 ; 99.56,98.268 ccw(c99.56,98.881) 99.994,98.448 ccw(c100.427,98.014) 99.814,98.014 ; 99.952,4.84 ccw(c100.024,5.565) 100.54,5.05 ; 99.952,60.84 ccw(c100.024,61.565) 100.54,61.05 ; 101.18,10.56 101.18,9.48 101.486,9.174 101.486,8.28 ; 101.18,66.56 101.18,65.48 101.486,65.174 101.486,64.28 ; 101.21,39.62 v1(101.84,40.25) 101.84,41.06 ; 101.21,39.874 ccw(c101.21,40.487) 101.644,40.054 ccw(c102.077,39.62) 101.464,39.62 ; 101.21,95.62 v1(101.84,96.25) 101.84,97.06 ; 101.21,95.874 ccw(c101.21,96.487) 101.644,96.054 ccw(c102.077,95.62) 101.464,95.62 ; 101.306,8.46 ccw(c100.873,8.893) 101.486,8.893 ccw(c102.099,8.893) 101.666,8.46 ; 101.306,64.46 ccw(c100.873,64.893) 101.486,64.893 ccw(c102.099,64.893) 101.666,64.46 ; 101.31,5.06 ccw(c100.877,4.627) 100.877,5.24 ccw(c100.877,5.853) 101.31,5.42 ; 101.31,61.06 ccw(c100.877,60.627) 100.877,61.24 ccw(c100.877,61.853) 101.31,61.42 ; 101.49,5.24 100.73,5.24 100.33,4.84 99.19,4.84 96.93,4.84 96.45,5.32 96.45,9.78 ; 101.49,61.24 100.73,61.24 100.33,60.84 99.19,60.84 96.93,60.84 96.45,61.32 96.45,65.78 ; 101.753,40.723 cw(c101.543,40.513) 101.84,40.513 cw(c102.137,40.513) 101.927,40.723 ; 101.753,96.723 cw(c101.543,96.513) 101.84,96.513 cw(c102.137,96.513) 101.927,96.723 ; 102.774,45.126 ccw(c102.774,44.513) 102.34,44.946 ccw(c101.907,45.38) 102.52,45.38 ccw(c101.907,45.38) 102.34,45.814 ccw(c102.774,46.247) 102.774,45.634 ; 102.774,101.126 ccw(c102.774,100.513) 102.34,100.946 ccw(c101.907,101.38) 102.52,101.38 ccw(c101.907,101.38) 102.34,101.814 ccw(c102.774,102.247) 102.774,101.634 ; 102.834,5.42 ccw(c102.401,5.853) 103.014,5.853 ccw(c103.627,5.853) 103.194,5.42 ; 102.834,6.58 cw(c102.401,6.147) 103.014,6.147 cw(c103.627,6.147) 103.194,6.58 ; 102.834,61.42 ccw(c102.401,61.853) 103.014,61.853 ccw(c103.627,61.853) 103.194,61.42 ; 102.834,62.58 cw(c102.401,62.147) 103.014,62.147 cw(c103.627,62.147) 103.194,62.58 ; 103.014,5.24 103.014,6.76 ; 103.014,61.24 103.014,62.76 ; 104.806,49.42 ccw(c104.373,49.853) 104.986,49.853 ccw(c105.599,49.853) 105.166,49.42 ; 104.806,50.58 cw(c104.373,50.147) 104.986,50.147 cw(c105.599,50.147) 105.166,50.58 ; 104.806,105.42 ccw(c104.373,105.853) 104.986,105.853 ccw(c105.599,105.853) 105.166,105.42 ; 104.806,106.58 cw(c104.373,106.147) 104.986,106.147 cw(c105.599,106.147) 105.166,106.58 ; 104.986,49.24 104.986,50.76 ; 104.986,105.24 104.986,106.76 ; 105.226,10.366 cw(c105.226,9.753) 105.66,10.186 cw(c106.093,10.62) 105.48,10.62 cw(c106.093,10.62) 105.66,11.054 cw(c105.226,11.487) 105.226,10.874 ; 105.226,66.366 cw(c105.226,65.753) 105.66,66.186 cw(c106.093,66.62) 105.48,66.62 cw(c106.093,66.62) 105.66,67.054 cw(c105.226,67.487) 105.226,66.874 ; 106.073,15.277 ccw(c105.863,15.487) 106.16,15.487 ccw(c106.457,15.487) 106.247,15.277 ; 106.073,71.277 ccw(c105.863,71.487) 106.16,71.487 ccw(c106.457,71.487) 106.247,71.277 ; 106.16,14.94 v1(106.16,15.75) 106.79,16.38 ; 106.16,70.94 v1(106.16,71.75) 106.79,72.38 ; 106.334,47.54 cw(c105.901,47.107) 106.514,47.107 cw(c107.127,47.107) 106.694,47.54 ; 106.334,103.54 cw(c105.901,103.107) 106.514,103.107 cw(c107.127,103.107) 106.694,103.54 ; 106.51,50.76 107.27,50.76 107.67,51.16 108.81,51.16 111.07,51.16 111.55,50.68 111.55,46.22 ; 106.51,106.76 107.27,106.76 107.67,107.16 108.81,107.16 111.07,107.16 111.55,106.68 111.55,102.22 ; 106.514,47.72 106.514,46.826 106.82,46.52 106.82,45.44 ; 106.514,103.72 106.514,102.826 106.82,102.52 106.82,101.44 ; 106.536,16.38 cw(c105.923,16.38) 106.356,15.946 cw(c106.79,15.513) 106.79,16.126 ; 106.536,72.38 cw(c105.923,72.38) 106.356,71.946 cw(c106.79,71.513) 106.79,72.126 ; 106.69,50.58 cw(c107.123,50.147) 107.123,50.76 cw(c107.123,51.373) 106.69,50.94 ; 106.69,106.58 cw(c107.123,106.147) 107.123,106.76 cw(c107.123,107.373) 106.69,106.94 ; 107.46,50.95 cw(c107.976,50.435) 108.048,51.16 ; 107.46,106.95 cw(c107.976,106.435) 108.048,107.16 ; 107.57,43.04 108.84,43.04 ; 107.57,99.04 108.84,99.04 ; 108.186,13.986 cw(c107.573,13.986) 108.006,13.552 cw(c108.44,13.119) 108.44,13.732 ; 108.186,69.986 cw(c107.573,69.986) 108.006,69.552 cw(c108.44,69.119) 108.44,69.732 ; 108.26,14.166 ccw(c107.827,14.599) 108.44,14.599 ccw(c109.053,14.599) 108.62,14.166 ; 108.26,70.166 ccw(c107.827,70.599) 108.44,70.599 ccw(c109.053,70.599) 108.62,70.166 ; 108.27,10.476 cw(c107.837,10.043) 108.45,10.043 cw(c109.063,10.043) 108.63,10.476 ; 108.27,66.476 cw(c107.837,66.043) 108.45,66.043 cw(c109.063,66.043) 108.63,66.476 ; v1(108.44,14.64) 108.44,13.986 107.914,13.46 106.48,13.46 106.02,13 106.02,11.414 105.226,10.62 v1(106.066,9.78) 108.45,9.78 ; v1(108.44,70.64) 108.44,69.986 107.914,69.46 106.48,69.46 106.02,69 106.02,67.414 105.226,66.62 v1(106.066,65.78) 108.45,65.78 ; 108.45,10.656 108.45,9.78 ; 108.45,66.656 108.45,65.78